# Altium PCB dv_spectrum_col.PcbDoc
Units mm, origin at the board's own origin, x right, y up, seen from the top; angles counter-clockwise.
Board outline 500 x 8.64 mm, 2 copper layers (Top Layer, Bottom Layer); 26 components, 58 nets, 172 pads, 76 vias.
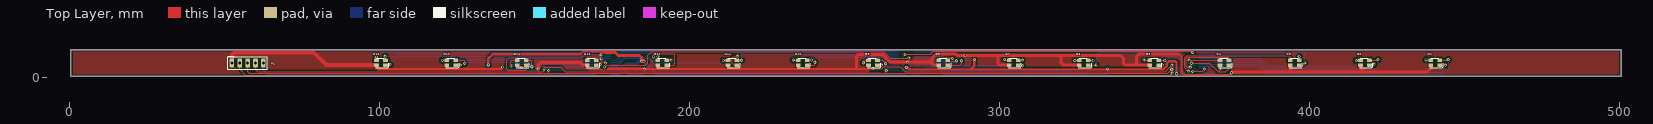
[diagram p0: Top Layer view]
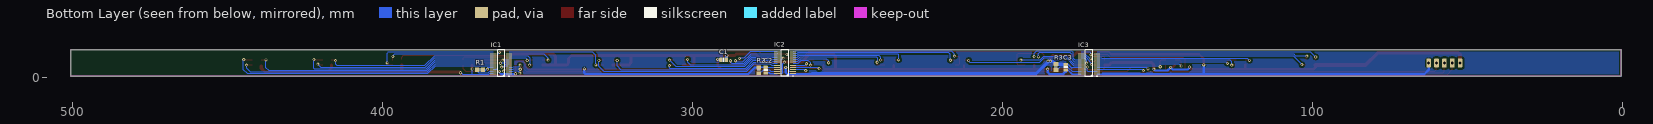
[diagram p1: Bottom Layer view, seen from below]
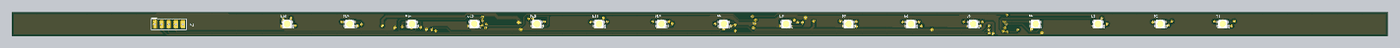
[diagram p2: 3D render of the assembled board from above, using the file's embedded part models]
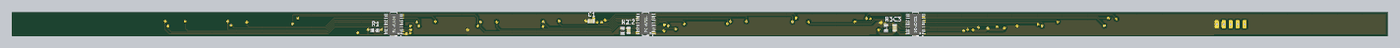
[diagram p3: 3D render of the assembled board from below, using the file's embedded part models]

## Layer stack, top to bottom
Top Layer: signal copper 0.0356
Dielectric: dielectric 0.32, FR-4, Dk 4.8
Bottom Layer: signal copper 0.0356

## Board outline
0.508,0.305 500.508,0.305 500.508,8.941 0.508,8.941

## Design rules (kind name [scope] priority, off if disabled: settings)
Clearance Clearance_1 [IsRegion] p1: gap=0.635
Clearance [All] p2: gap=0.254
PolygonConnect [All] p1: connectstyle=Relief reliefconductorwidth=0.254 reliefentries=4 polygonreliefangle="90 Angle" airgapwidth=0.254
RoomDefinition dv_spectrum_col [InComponentClass('dv_spectrum_col')] p1: confinementstyle=ConfineIn formatcopy=TRUE lockcomponents=FALSE outline -358.013,-778.459 -225.298,-778.459 -225.298,-769.95 -358.013,-769.95
RoutingVias [All] p1: holewidth=0.5 width=1 viastyle="Through Hole" minholewidth=0.5 minwidth=1 maxholewidth=0.5 maxwidth=1
SolderMaskExpansion [All] p1: expansion=0.102
Width [All] p1: maxlimit=1.27 minlimit=0.254 preferedwidth=0.254
28 further rules are at their usual default settings.

## Components (designator, comment, footprint, x,y, rotation, side; value= is the part's Value field where it differs from the comment)
C1 "1uF-50V-5%" CAPC2012X135N 289.992,5.715 r180 bottom
C2 "1uF-50V-5%" CAPC2012X135N 276.428,2.362 r270 bottom
C3 "1uF-50V-5%" CAPC2012X135N 179.68,3.302 r270 bottom
D1 "LED_RGB" LED3528(1210)-RGB 440.559,4.724 r0 top
D2 "LED_RGB" LED3528(1210)-RGB 417.892,4.724 r0 top
D3 "LED_RGB" LED3528(1210)-RGB 395.225,4.724 r0 top
D4 "LED_RGB" LED3528(1210)-RGB 372.559,4.724 r0 top
D5 "LED_RGB" LED3528(1210)-RGB 349.892,4.724 r0 top
D6 "LED_RGB" LED3528(1210)-RGB 327.225,4.724 r0 top
D7 "LED_RGB" LED3528(1210)-RGB 304.559,4.724 r0 top
D8 "LED_RGB" LED3528(1210)-RGB 281.892,4.724 r0 top
D9 "LED_RGB" LED3528(1210)-RGB 259.225,4.724 r0 top
D10 "LED_RGB" LED3528(1210)-RGB 236.559,4.724 r0 top
D11 "LED_RGB" LED3528(1210)-RGB 213.892,4.724 r0 top
D12 "LED_RGB" LED3528(1210)-RGB 191.225,4.724 r0 top
D13 "LED_RGB" LED3528(1210)-RGB 168.559,4.724 r0 top
D14 "LED_RGB" LED3528(1210)-RGB 145.892,4.724 r0 top
D15 "LED_RGB" LED3528(1210)-RGB 123.225,4.724 r0 top
D16 "LED_RGB" LED3528(1210)-RGB 100.559,4.724 r0 top
IC1 "MBI5027" SSOP24 361.721,5.258 r90 bottom
IC2 "MBI5027" SSOP24 270.154,5.359 r90 bottom
IC3 "MBI5027" SSOP24 172.11,5.258 r90 bottom
P1 "Header 5" HDR1X5 52.451,4.623 r0 top
R1 "Res1" R0805 368.529,2.438 r0 bottom
R2 "Res1" R0805 278.613,2.261 r270 bottom
R3 "Res1" R0805 182.804,3.302 r270 bottom

## Footprints (in the part's own frame and the unit in brackets; to place one, negate y for a bottom-side part, rotate by r counter-clockwise, add the part's x,y. Pads: shape width x height; smd on the part's side, far side on the other; paste and mask are expansions set on the pad)
CAPC2012X135N [mm] "Chip Capacitor, Body 2.0x1.2mm, EIA 0805, IPC Medium Density"
  round 0.254 on Mech15: 0(0,0)
  rrect25% 1x1.4 smd: 1(-0.9,0) 2(0.9,0)
  Top Layer pour cut-out: -0.675,0.7 -0.475,0.9 0.475,0.9 0.675,0.7 0.675,-0.7 0.475,-0.9 -0.475,-0.9 -0.675,-0.7
  silkscreen extent -0.15,-0.65 0.15,0.65, body extent -1.1,-0.72 1.1,0.73, height 1.34
HDR1X5 [mm] "Connector; Header; 5 Position"
  rrect50% 1.5x3 hole 0.9: 1(0,0) 2(2.54,0) 3(5.08,0) 4(7.62,0) 5(10.16,0)
  silkscreen extent -1.27,-1.98 11.43,2.22
LED3528(1210)-RGB [mm] "Molded body capacitor, Body 3.5x2.8mm, 1210, IPC Nominal settings"
  round 0.254 on Mech15: 0(0,0)
  rrect25% 1.5x1.1 smd: 1(1.45,-0.75) 2(-1.45,-0.75) 3(-1.45,0.75) 4(1.45,0.75)
  Top Layer pour cut-out: -0.508,1.27 0.508,1.27 0.508,-1.27 -0.508,-1.27
  silkscreen extent -1.76,-1.55 2.49,1.5, body extent -1.73,-1.39 1.77,1.41, height 1.86
R0805 [mm] "Chip Resistor; Body 2.0 x 1.2 mm (LxW typ)"
  rect 1.3x1.5 smd: 1(0.95,0) 2(-0.95,0)
  silkscreen extent 0,-0.5 0,0.5, body extent -1,-0.65 1,0.6, height 0.78
SSOP24 [mm] "SSOP; 24 Leads; Body Width 3.9 mm; Pitch 0.635 mm"
  rrect25% 0.3x2 smd: 1(-4.127,-2.575) 2(-3.492,-2.575) 3(-2.857,-2.575) 4(-2.222,-2.575) 5(-1.588,-2.575) 6(-0.953,-2.575) 7(-0.318,-2.575) 8(0.317,-2.575) 9(0.952,-2.575) 10(1.587,-2.575) 11(2.222,-2.575) 12(2.857,-2.575) 13(2.857,2.575) 14(2.222,2.575) 15(1.588,2.575) 16(0.953,2.575) 17(0.318,2.575) 18(-0.317,2.575) 19(-0.952,2.575) 20(-1.587,2.575) 21(-2.222,2.575) 22(-2.857,2.575) 23(-3.492,2.575) 24(-4.127,2.575)
  silkscreen extent -5,-2.7 3.6,1.18, body extent -4.59,-3.31 3.31,3.25, height 1.2

## Part data
C1 C2 C3: library part Cap, "CAP CER 15PF 50V 5% NPO 0603"
D1 D2 D3 D4 D5 D6 D7 D8 D9 D10 D11 D12 D13 D14 D15 D16: library part LED_RGB_1210
IC1 IC2 IC3: "16 bit Constant Current LED"
P1: "Header, 5-Pin"
R1 R2 R3: "Resistor"

## Via types
v1: diameter 1, hole 0.5, Top Layer to Bottom Layer, 75 vias
v2: diameter 1, hole 0.5, Top Layer to Bottom Layer, tented both sides, 1 vias

## Nets (pads, with @x,y where several pads share a name; then routed paths per layer and width w, separated by ;. In a path a pad name is that pad's centre, name@x,y a point inside that pad or via, vN(x,y) a via of type N, cw(c..) or ccw(c..) an arc to the next point about the centre after c; other vN are vias at no path point)
B0: D1.3 IC1.18 | length 79
  Top Layer w0.254: v1(437.566,5.664) 437.756,5.474 D1.3
  Bottom Layer w0.254: IC1.18 383.125,4.94 385.906,2.159 436.55,2.159 437.566,3.175 v1(437.566,5.664)
B1: D2.3 IC1.15 | length 54.9
  Top Layer w0.254: v1(415.112,5.41) 415.176,5.474 D2.3
  Bottom Layer w0.254: IC1.15 383.375,6.845 386.537,3.683 414.579,3.683 415.112,4.216 v1(415.112,5.41)
B2: D3.3 IC1.5 | length 42.5
  Top Layer w0.254: v1@360.629,2.159 359.697,3.091 359.697,6.314 360.347,6.964 362.462,6.964 362.467,6.96 393.394,6.96 393.775,6.579 D3.3@393.775,5.791
  Bottom Layer w0.254: IC1.5@359.664,3.67 360.07,3.67 360.124,3.616 360.275,3.616 360.527,3.364 360.527,2.438 v1(360.934,2.032) v1@361.061,2.032
B3: D4.3 IC1.8 | length 11.3
  Top Layer w0.254: v1(361.15,5.575) D4.3@370.421,5.575
  Bottom Layer w0.254: IC1.8 v1(361.15,5.575)
B4: D5.3 IC1.11 | length 15.9
  Top Layer w0.254: v1(346.558,5.588) 346.671,5.474 D5.3
  Bottom Layer w0.254: v1@346.431,5.359 v1@346.431,5.588 ; v1(346.558,5.588) 346.558,6.223 347.815,7.48 IC1.11
B5: D6.3 IC2.19 | length 56.5
  Top Layer w0.254: v1(324.282,5.461) 324.295,5.474 D6.3
  Bottom Layer w0.254: IC2.19 274.267,4.407 274.668,4.808 277.328,4.808 ; 277.328,4.792 280.432,4.792 282.862,2.362 322.936,2.362 324.282,3.708 v1(324.282,5.461)
B6: D7.3 IC2.16 | length 32.8
  Top Layer w0.254: v1(301.6,5.817) 301.942,5.474 D7.3
  Bottom Layer w0.254: IC2.16 274.017,6.312 274.037,6.332 281.047,6.332 283.493,3.886 300.533,3.886 301.6,4.953 v1(301.6,5.817)
B7: D8.3 IC2.13 | length 18
  Top Layer w0.254: D8.3 280.658,5.474 281.589,6.405 284.628,6.405 v1(284.912,6.121)
  Bottom Layer w0.254: IC2.13 281.317,8.217 283.413,6.121 v1(284.912,6.121)
B8: D9.3 IC2.7 | length 14.7
  Top Layer w0.254: v1(256.108,4.724) 256.858,5.474 D9.3
  Bottom Layer w0.254: v1(256.108,4.724) 256.108,5.396 256.642,5.93 265.283,5.93 266.171,5.042 IC2.7
B9: D10.3 IC2.10 | length 38
  Top Layer w0.254: v1(233.528,5.639) 233.692,5.474 D10.3
  Bottom Layer w0.254: v1@233.502,5.309 233.502,7.327 233.629,7.454 265.915,7.454 266.421,6.947 IC2.10
B10: D11.3 IC3.20 | length 39.7
  Top Layer w0.254: v1(210.947,5.461) 210.96,5.474 D11.3
  Bottom Layer w0.254: IC3.20 176.913,3.67 179.364,6.121 186.715,6.121 188.155,4.682 210.472,4.682 v1@211.074,5.283
B11: D12.3 IC3.17 | length 20.4
  Top Layer w0.254: D12.3 189.775,6.616 v1(189.865,6.706)
  Bottom Layer w0.254: IC3.17 176.619,5.575 177.268,6.224 177.268,8.078 177.659,8.47 189.168,8.47 189.865,7.772 v1(189.865,6.706) v1@189.865,6.375
B12: D13.3 IC3.14 | length 9.5
  Top Layer w0.254: D13.3 167.109,6.479 167.284,6.655 170.891,6.655 171.552,5.994 v1@171.552,5.969
  Bottom Layer w0.254: v1@171.907,5.969 171.766,5.969 173.277,7.48 IC3.14
  other v1: 171.526,5.994
B13: D14.3 IC3.6 | length 31
  Top Layer w0.254: v1(142.418,3.683) 142.418,5.08 142.812,5.474 D14.3
  Bottom Layer w0.254: v1(142.418,3.683) 143.04,4.305 148.805,4.305 148.809,4.31 149.443,4.31 149.539,4.31 149.544,4.305 IC3.6
B14: D15.3 IC3.9 | length 51
  Top Layer w0.254: v1(120.371,5.486) 120.383,5.474 D15.3
  Bottom Layer w0.254: v1@120.472,5.283 120.472,5.486 121.015,6.029 167.843,6.029 167.97,6.156 169.481,6.156 IC3.9
B15: D16.3 IC3.12 | length 72.5
  Top Layer w0.254: v1(99.009,6.579) 99.109,6.479 D16.3
  Bottom Layer w0.254: v1@99.009,6.375 v1(99.009,6.579) 100.546,8.115 IC3.12
G0: D1.4 IC1.20 | length 88.4
  Top Layer w0.254: D1.4 444.513,5.474 v1(444.754,5.715)
  Bottom Layer w0.254: IC1.20 382.958,3.67 385.485,1.143 443.433,1.143 444.83,2.54 v1@444.83,5.918
G1: D2.4 IC1.17 | length 64.8
  Top Layer w0.254: D2.4 421.857,5.474 v1(422.097,5.715)
  Bottom Layer w0.254: IC1.17 383.208,5.575 386.116,2.667 421.869,2.667 422.097,2.896 v1(422.097,5.715)
G2: D3.4 IC1.14 | length 34.3
  Top Layer w0.254: v1(396.646,6.756) 396.675,6.728 D3.4
  Bottom Layer w0.254: IC1.14 396.126,7.48 396.646,6.96 v1(396.646,6.756) v1@396.646,6.477
G3: D4.4 IC1.6 | length 21.2
  Top Layer w0.254: v1@361.518,3.277 360.553,3.277 360.205,3.624 360.205,6.104 360.558,6.456 361.515,6.456 361.52,6.452 373.805,6.452 374.009,6.248 D4.4@374.009,5.772
  Bottom Layer w0.254: IC1.6 360.312,4.305 361.29,3.327 v1(361.518,3.327)
G4: D5.4 IC1.9 | length 8.4
  Top Layer w0.254: D5.4 v1@353.314,5.474
  Bottom Layer w0.254: v1(353.314,5.461) 353.314,5.918 353.606,6.21 IC1.9
G5: D6.4 IC2.20 | length 62.8
  Top Layer w0.254: D6.4 v1@330.187,5.474
  Bottom Layer w0.254: IC2.20 274.351,3.772 274.862,4.284 280.222,4.284 282.651,1.854 328.498,1.854 330.2,3.556 v1(330.2,5.461)
G6: D7.4 IC2.17 | length 38.1
  Top Layer w0.254: D7.4 307.328,5.474 v1(307.416,5.563)
  Bottom Layer w0.254: IC2.17 274.1,5.677 274.247,5.824 280.837,5.824 283.282,3.378 305.232,3.378 v1(307.416,5.563)
G7: D8.4 IC2.14 | length 17.8
  Top Layer w0.254: D8.4 283.686,5.131 285.928,5.131 v1(286.156,5.359)
  Bottom Layer w0.254: IC2.14 272.783,7.528 281.288,7.528 283.914,4.902 285.699,4.902 v1(286.156,5.359)
G8: D9.4 IC2.5 | length 7.2
  Top Layer w0.254: D9.4 262.369,5.474 v1@263.093,4.75
  Bottom Layer w0.254: v1(263.296,4.394) 263.865,3.826 IC2.5@267.259,3.826 ; IC2.5@267.259,3.772 IC2.5
G9: D10.4 IC2.9 | length 31
  Top Layer w0.254: D10.4 239.205,5.474 v1(239.344,5.613)
  Bottom Layer w0.254: v1(239.344,5.613) 239.344,6.565 239.725,6.946 265.704,6.946 266.338,6.312 IC2.9
G10: D11.4 IC2.11 | length 54.5
  Top Layer w0.254: D11.4 v1@216.777,5.474
  Bottom Layer w0.254: v1(216.84,5.537) 216.84,7.505 217.297,7.962 266.125,7.962 266.451,7.636 267.525,7.636 IC2.11
G11: D12.4 IC3.19 | length 22.3
  Top Layer w0.254: D12.4 194.044,5.474 v1(194.132,5.563)
  Bottom Layer w0.254: IC3.19 176.829,4.305 179.153,6.629 186.944,6.629 188.011,5.563 v1(194.132,5.563)
G12: D13.4 IC3.16 | length 6.2
  Top Layer w0.254: D13.4 170.37,5.113 172.382,5.113 v1(172.898,4.597)
  Bottom Layer w0.254: v1(172.898,4.597) 172.941,4.64 172.941,5.707 ; 172.999,5.766 173.444,6.21 IC3.16
G13: D14.4 IC3.5 | length 23.5
  Top Layer w0.254: D14.4 149.008,5.474 149.174,5.309 v1@149.174,3.861
  Bottom Layer w0.254: v1@149.365,3.67 IC3.5
  other v1: 149.174,3.429
G14: D15.4 IC3.7 | length 45.8
  Top Layer w0.254: D15.4 127.291,5.474 127.533,5.232 v1(127.533,4.547)
  Bottom Layer w0.254: v1(127.533,4.547) 127.927,4.94 IC3.7
G15: D16.4 IC3.11 | length 69.6
  Top Layer w0.254: v1(101.879,6.858) 102.009,6.729 D16.4
  Bottom Layer w0.254: v1(101.879,6.858) 105.403,6.858 105.971,7.426 IC3.11@169.85,7.426
GND: C1.1 C2.1 C3.1 IC1.1 IC1.21 IC2.1 IC2.21 IC3.1 IC3.21 P1.5 R1.2 R2.2 R3.2 | length 448
  Top Layer w0.254: v1(362.306,1.93) 365.608,1.93 366.192,2.515 v1@366.192,2.997
  Top Layer w0.508: 164.948,7.493 165.797,8.343 172.537,8.343
  Top Layer w0.762: v1@135.179,4.013 135.179,6.096 136.576,7.493 164.948,7.493 ; v1(269.951,3.251) 270.27,3.251 270.967,2.554 290.691,2.554 ; v1(291.922,5.817) 291.922,3.785 290.691,2.554 ; v1(357.099,1.168) 357.099,4.826 356.743,5.182 354.64,5.182 353.939,4.481 353.939,3.719 352.774,2.554 290.691,2.554
  Top Layer w1.016: 172.537,8.089 175.934,8.089 176.962,7.061 183.921,7.061 184.607,6.375 v1(184.607,5.232) v2(185.368,5.232)
  Bottom Layer w0.254: 261.493,0.776 261.749,1.032 ; v1@357.441,1.13 IC1.1 361.963,1.13 362.306,1.473 v1(362.306,1.93)
  Bottom Layer w0.3: IC3.21 177.737,3.035 ; IC2.21 C2.1@276.303,3.137 ; IC1.21 v1@366.077,3.035
  Bottom Layer w0.5: v1(357.099,1.168) 357.368,0.899 361.731,0.899 361.963,1.13
  Bottom Layer w0.508: 167.793,1.029 IC3.1@169.535,1.029 ; 177.737,3.035 178.903,4.202 C3.1 ; C2.1@276.303,3.137 C2.1 R2.2@278.539,3.262 ; v1@366.077,3.035 366.878,2.235 R1.2@367.248,2.235
  Bottom Layer w0.762: P1.5 62.611,2.413 63.994,1.03 135.128,1.03 ; v1@135.128,3.759 135.128,1.03 ; 167.793,1.03 135.128,1.03 ; 261.567,1.032 261.749,1.032 269.358,1.032 269.951,1.626 v1(269.951,3.251) ; R2.2 279.933,3.211 282.052,1.092 334.543,1.092 334.899,1.448 v1(334.899,2.743) ; C1.1 291.821,5.715 v1(291.922,5.817)
  Bottom Layer w1.016: C3.1 179.73,4.252 R3.2 183.784,5.232 v1(184.607,5.232) 185.141,5.232 189.216,1.157 261.442,1.157
  other v1: 366.192,2.692 135.128,4.013
LE: IC1.4 IC2.4 IC3.4 P1.4 | length 330.9
  Top Layer w0.254: P1.4 60.071,2.452 60.731,1.792 152.679,1.792 153.111,2.224 v1(153.111,2.743) 153.568,3.2 158.586,3.2 159.995,1.792 257.592,1.792 258.645,2.845 v1(259.207,2.845) 262.028,2.845 262.696,3.513 267.962,3.513 269.683,1.792 353.486,1.792 355.6,3.906 v1(355.6,3.962)
  Bottom Layer w0.254: v1(153.111,2.743) 153.459,3.091 166.923,3.091 166.979,3.035 IC3.4 ; v1(259.207,2.845) 259.469,3.107 266.121,3.107 ; 266.121,3.137 IC2.4 ; v1@355.6,3.869 v1(355.6,3.962) 356.221,3.342 357.765,3.342 358.072,3.035 IC1.4
MOSI: IC1.2 P1.2 | length 307.7
  Top Layer w0.254: P1.2 54.991,2.591 56.806,0.776 355.106,0.776 v1(355.702,1.372)
  Bottom Layer w0.254: v1(355.702,1.372) 355.702,1.515 356.244,2.057 357.613,2.057 357.905,1.765 IC1.2
NetIC1_22: IC1.22 IC2.2 | length 107.5
  Top Layer w0.254: v1(269.596,7.442) 277.637,7.442 278.664,8.47 361.862,8.47 v1(362.28,8.052)
  Bottom Layer w0.254: IC2.2 268.668,1.867 269.037,2.235 269.037,6.883 v1(269.596,7.442) ; v1(362.28,8.052) 362.902,7.429 362.902,2.824 ; 362.915,2.811 362.902,2.824 ; 363.282,2.454 IC1.22@363.336,2.4 ; IC1.22 IC1.22@363.336,2.4 ; 362.902,2.824 362.902,2.743 362.915,2.73 362.915,2.707 363.222,2.4 IC1.22@363.336,2.4
NetIC1_23: IC1.23 R1.1 | length 6.1
  Bottom Layer w0.254: IC1.23 365.57,1.765 366.027,1.307 368.718,1.307 369.479,2.068 R1.1
NetIC2_22: IC2.22 IC3.2 | length 112.2
  Top Layer w0.254: v1(172.593,3.353) 172.899,3.353 173.534,3.988 185.826,3.988 186.588,4.75 186.588,7.112 187.782,8.306 262.712,8.306 264.795,6.223 v1(270.815,6.223)
  Bottom Layer w0.254: IC3.2 172.326,1.765 172.771,2.21 v1@172.771,3.353 ; v1(270.815,6.223) 271.348,5.69 271.348,2.794 271.64,2.502 IC2.22
NetIC2_23: IC2.23 R2.1 | length 6.5
  Bottom Layer w0.254: IC2.23 274.688,1.867 275.165,2.343 277.213,2.343 278.245,1.311 R2.1
NetIC3_23: IC3.23 R3.1 | length 9.1
  Bottom Layer w0.254: IC3.23 177.406,1.765 178.599,2.958 178.599,2.987 178.895,3.283 181.534,3.283 182.465,2.352 R3.1
R0: D1.1 IC1.19 | length 83.9
  Top Layer w0.254: D1.1 v1@443.775,3.974
  Bottom Layer w0.254: IC1.19 383.041,4.305 385.696,1.651 442.493,1.651 443.789,2.946 v1(443.789,3.988)
R1: D2.1 IC1.16 | length 59.9
  Top Layer w0.254: D2.1 420.534,3.974 v1(420.853,4.293)
  Bottom Layer w0.254: IC1.16 383.291,6.21 386.327,3.175 419.735,3.175 v1(420.853,4.293)
R2: D3.1 IC1.13 | length 39.6
  Top Layer w0.254: D3.1 397.801,3.974 v1(398.526,4.699)
  Bottom Layer w0.254: IC1.13 398.259,8.115 398.526,7.849 v1(398.526,4.699)
R3: D4.1 IC1.7 | length 17.7
  Top Layer w0.254: v1(361.929,4.581) 367.706,4.581 370.484,1.803 372.999,1.803 374.009,2.813 D4.1
  Bottom Layer w0.254: IC1.7 359.2,4.886 360.449,4.886 360.754,4.581 v1(361.929,4.581)
R4: D5.1 IC1.10 | length 10.8
  Top Layer w0.254: D5.1 352.921,3.974 v1@352.933,3.962
  Bottom Layer w0.254: v1@352.374,3.988 352.374,6.172 353.047,6.845 IC1.10
  other v1: 352.577,3.962
R5: D6.1 IC1.12 | length 34.3
  Top Layer w0.254: D6.1 331.152,3.974 v1(331.191,4.013)
  Bottom Layer w0.254: v1@331.241,3.734 331.241,7.214 332.143,8.115 IC1.12
R6: D7.1 IC2.18 | length 38.1
  Top Layer w0.254: D7.1 307.277,3.974 v1(307.442,3.81)
  Bottom Layer w0.254: IC2.18 274.184,5.042 274.458,5.316 280.626,5.316 283.072,2.87 307.111,2.87 307.442,3.2 v1(307.442,3.81)
R7: D8.1 IC2.15 | length 22.3
  Top Layer w0.254: D8.1 287.388,3.974 287.782,4.369 v1(287.782,5.359)
  Bottom Layer w0.254: IC2.15@272.72,6.893 281.205,6.893 283.703,4.394 287.198,4.394 287.782,4.978 v1(287.782,5.359)
R8: D9.1 IC2.6 | length 8.6
  Top Layer w0.254: D9.1 262.013,3.974 v1@262.153,4.115
  Bottom Layer w0.254: v1(261.925,3.988) 261.925,4.736 262.611,5.422 265.073,5.422 266.088,4.407 IC2.6
R9: D10.1 IC2.8 | length 32.2
  Top Layer w0.254: D10.1 240.296,3.974 240.462,4.14 v1(240.462,4.877)
  Bottom Layer w0.254: v1@240.284,4.877 240.284,6.108 240.614,6.438 265.494,6.438 266.255,5.677 IC2.8
R10: D11.1 IC2.12 | length 59
  Top Layer w0.254: D11.1 214.313,3.974 213.792,4.496 213.792,6.426 214.097,6.731 v1@215.443,6.731
  Bottom Layer w0.254: v1@215.621,6.579 215.621,7.696 216.394,8.47 267.106,8.47 267.359,8.217 IC2.12
  other v1: 215.468,6.858
R11: D12.1 IC3.18 | length 30.7
  Top Layer w0.254: v1(188.417,6.629) 188.417,7.442 188.671,7.696 195.072,7.696 195.326,7.442 195.326,4.369 194.932,3.974 D12.1
  Bottom Layer w0.254: IC3.18 176.746,4.94 177.776,5.97 177.776,7.506 178.232,7.962 188.163,7.962 188.443,7.682 v1@188.443,6.782
R12: D13.1 IC3.15 | length 6.3
  Top Layer w0.254: D13.1 171.413,3.974 v1@171.425,3.962
  Bottom Layer w0.254: v1(171.374,4.14) 171.374,4.596 172.433,5.655 172.433,5.917 173.36,6.845 IC3.15
R13: D14.1 IC3.13 | length 45.9
  Top Layer w0.254: D14.1 147.342,2.627 147.015,2.3 141.427,2.3 141.122,2.605 141.122,5.817 141.711,6.405 165.125,6.405 166.035,7.315 v1(171.526,7.315)
  Bottom Layer w0.254: v1(171.526,7.315) 171.526,7.874 171.767,8.115 IC3.13
R14: D15.1 IC3.8 | length 46.1
  Top Layer w0.254: D15.1 126.098,3.974 v1(126.111,3.988)
  Bottom Layer w0.254: v1(126.111,3.988) 126.111,5.004 126.628,5.521 169.481,5.521 IC3.8
R15: D16.1 IC3.10 | length 69
  Top Layer w0.254: D16.1 103.314,3.974 v1(103.454,4.115)
  Bottom Layer w0.254: v1@103.378,3.861 103.378,4.115 106.108,6.845 IC3.10
SCK: IC1.3 IC2.3 IC3.3 P1.3 | length 326.5
  Top Layer w0.254: P1.3 57.531,1.817 58.064,1.284 154.534,1.284 ; v1(154.584,2.21) 154.584,1.335 154.534,1.284 ; v1(263.474,2.21) 263.474,1.309 263.5,1.284 ; v1(355.582,2.642) 355.582,2.586 354.279,1.284 263.5,1.284 ; 154.534,1.284 261.481,1.284 263.5,1.284
  Bottom Layer w0.254: v1(154.584,2.21) 154.775,2.4 IC3.3 ; v1@263.474,2.218 v1(263.474,2.21) 263.766,2.502 IC2.3 ; v1(355.582,2.642) 357.747,2.642 357.988,2.4 IC1.3
VCC: C1.2 C2.2 C3.2 D1.2 D2.2 D3.2 D4.2 D5.2 D6.2 D7.2 D8.2 D9.2 D10.2 D11.2 D12.2 D13.2 D14.2 D15.2 D16.2 IC1.24 IC2.24 IC3.24 P1.1 | length 495.1
  Top Layer w0.381: 172.093,2.408 173.761,2.408
  Top Layer w0.508: D13.2 167.109,3.085 167.767,2.427 172.093,2.427 ; 357.81,7.581 358.808,6.582 358.808,1.403 359.308,0.903 374.232,0.903 v1(374.828,1.499)
  Top Layer w0.762: D14.2 145.191,3.226 v1(145.796,3.226) ; 173.761,2.554 173.9,2.692 ; v1(185.471,2.692) 185.482,2.681 189.611,2.681 ; D12.2 189.775,2.845 189.611,2.681 ; D11.2 212.442,2.823 212.584,2.681 ; D10.2 235.109,3.005 235.433,2.681 ; 253.924,2.87 253.924,2.681 ; D9.2 257.775,3.052 257.404,2.681 253.924,2.681 ; 189.611,2.681 212.584,2.681 ; 212.584,2.681 235.433,2.681 ; 235.433,2.681 253.924,2.681
  Top Layer w0.889: D16.2 99.109,3.254 99.746,2.617 121.895,2.617 ; D15.2 121.775,2.737 121.895,2.617 ; v1(139.751,3.353) 139.015,2.617 121.895,2.617
  Top Layer w1.016: v1(151.232,2.681) 151.232,4.039 152.044,4.851 164.756,4.851 165.633,3.974 D13.2 ; 173.863,2.681 173.875,2.692 173.9,2.692 v1(185.471,2.692) ; 253.924,2.87 253.924,6.858 254.483,7.417 262.344,7.417 264.833,4.928 v1(270.383,4.928) 277.724,4.928 278.257,4.394 ; D8.2 278.677,3.974 278.257,4.394 ; D7.2 300.013,3.974 299.517,4.47 299.517,7.079 ; D6.2 320.587,3.974 319.888,4.674 319.888,7.079 ; D5.2 344.145,3.974 ; 357.81,7.581 345.045,7.581 344.145,6.68 344.145,3.974 ; v1@371.109,3.037 D4.2 ; v1(374.828,1.499) 375.056,1.727 394.208,1.727 ; D3.2 393.775,2.16 394.208,1.727 ; D2.2 416.442,3.039 417.754,1.727 ; D1.2@439.109,3.658 439.109,2.965 437.871,1.727 417.754,1.727 ; 278.257,4.394 278.257,6.147 279.691,7.581 285.771,7.581 286.29,7.061 v1(288.95,7.061) 290.99,7.061 291.008,7.079 299.517,7.079 ; 299.517,7.079 319.888,7.079 ; 319.888,7.079 339.022,7.079 340.004,6.096 340.004,4.597 340.627,3.974 344.145,3.974 ; 394.208,1.727 417.754,1.727
  Top Layer w1.27: P1.1 52.451,7.327 53.086,7.962 78.932,7.962 82.919,3.974 D16.2
  Bottom Layer w0.254: v1(270.383,4.928) 270.84,4.47 270.84,1.692 271.301,1.232 IC2.24 ; IC1.24 365.486,1.13 365.817,0.799 373.951,0.799 374.65,1.499 v1(374.828,1.499) ; 370.916,0.825 371.069,0.977 v1(371.069,2.718)
  Bottom Layer w0.508: IC3.24@174.774,1.041 177.58,1.041 178.941,2.402 C3.2 ; IC2.24@272.729,1.159 274.93,1.159 275.233,1.462 C2.2
  Bottom Layer w0.762: v1(139.751,3.353) 139.751,3.099 140.31,2.54 145.136,2.54 145.796,3.2 v1(145.796,3.226) 146.787,2.235 150.786,2.235 v1(151.232,2.681) ; C3.2 179.68,1.879 180.492,1.067 184.861,1.067 185.471,1.676 v1(185.471,2.692) ; v1(288.95,7.061) v1@289.092,6.92
  Bottom Layer w1.016: C1.2 v1@289.092,6.92
pads on no net: C1.0 C2.0 C3.0 D1.0 D2.0 D3.0 D4.0 D5.0 D6.0 D7.0 D8.0 D9.0 D10.0 D11.0 D12.0 D13.0 D14.0 D15.0 D16.0 IC3.22

## Polygon pours and split planes (outlines as drawn)
VCC on Top Layer "Top Layer-No Net" (solid, remove dead copper, pour order 3): 0.508,0.305 500.508,0.305 500.508,8.941 0.508,8.941
GND on Bottom Layer "Top Layer-No Net1" (solid, remove dead copper, pour order 6): 0.508,0.305 500.508,0.305 500.508,8.941 0.508,8.941

## Keep-outs
Keep-Out Layer:
  the board outline again, w0.18